# Altium PCB PCB1.PcbDoc
Units mil, origin at the board's own origin, x right, y up, seen from the top; angles counter-clockwise.
Board outline 3385.83 x 2204.72 mil, 2 copper layers (Top Side, Bottom Layer), stack 69.729 mil thick; 1 components, 52 nets, 636 pads, 1 vias.
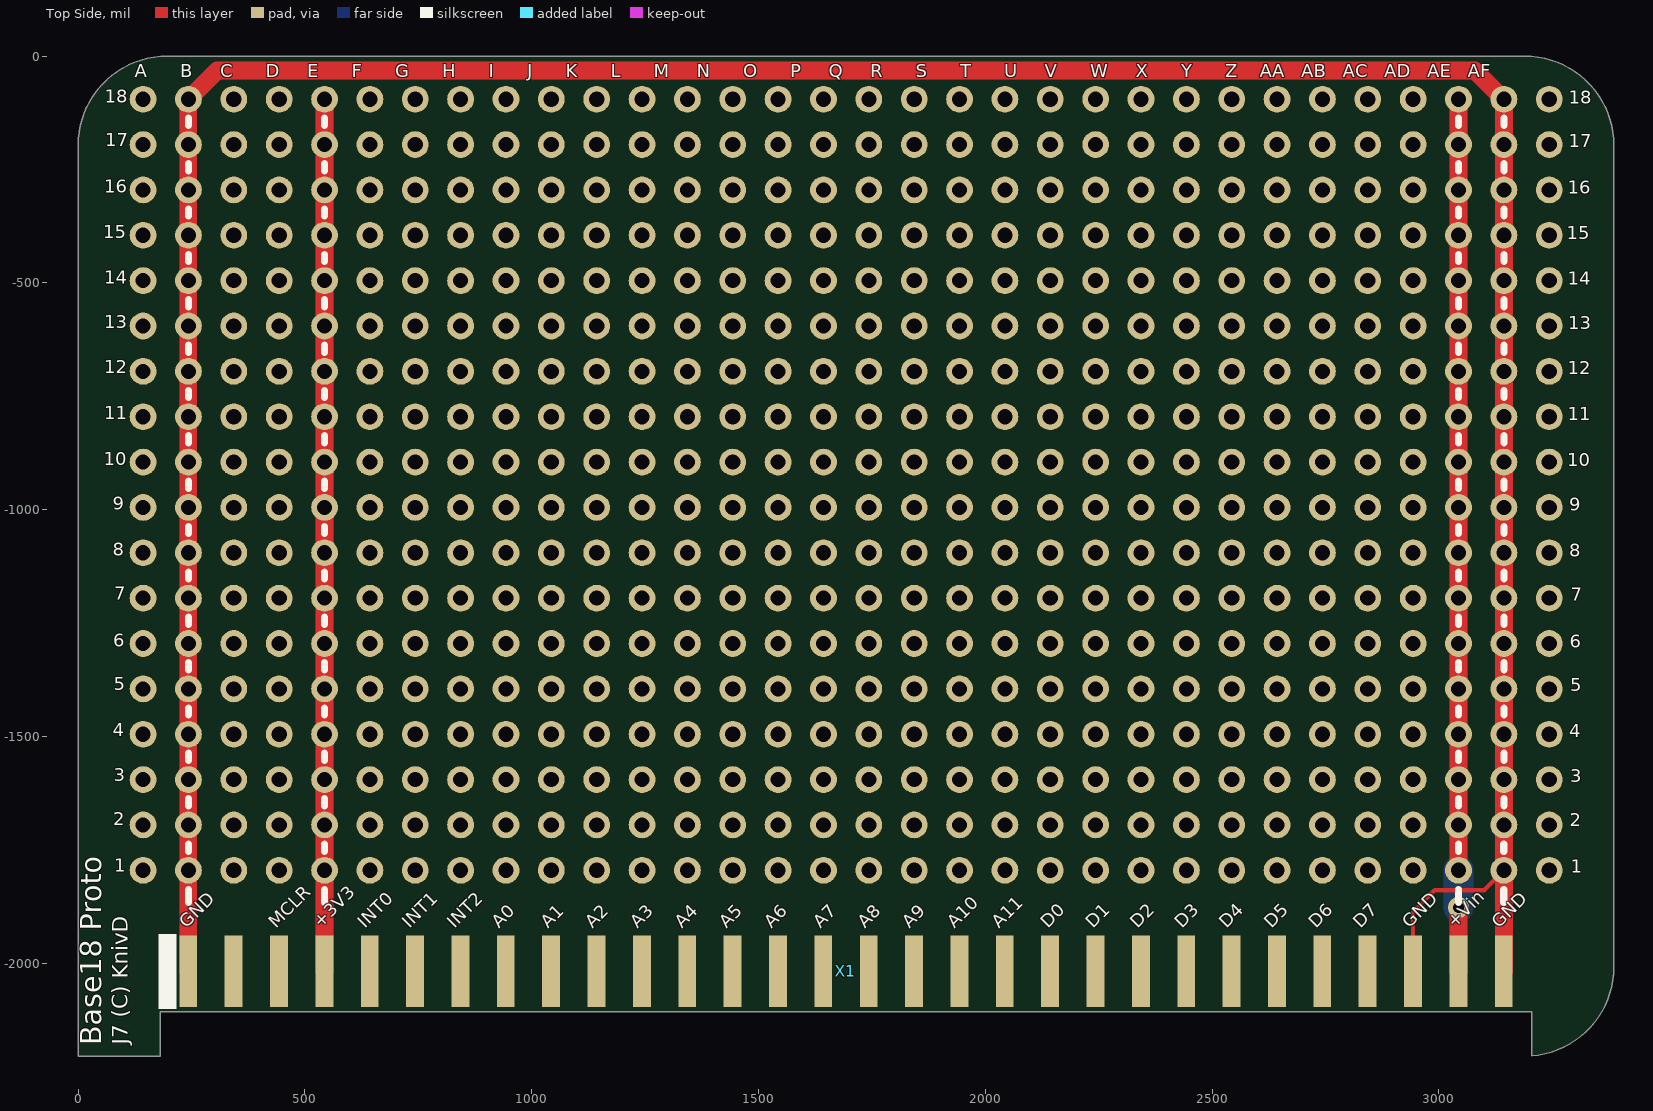
[diagram p0: Top Side view]
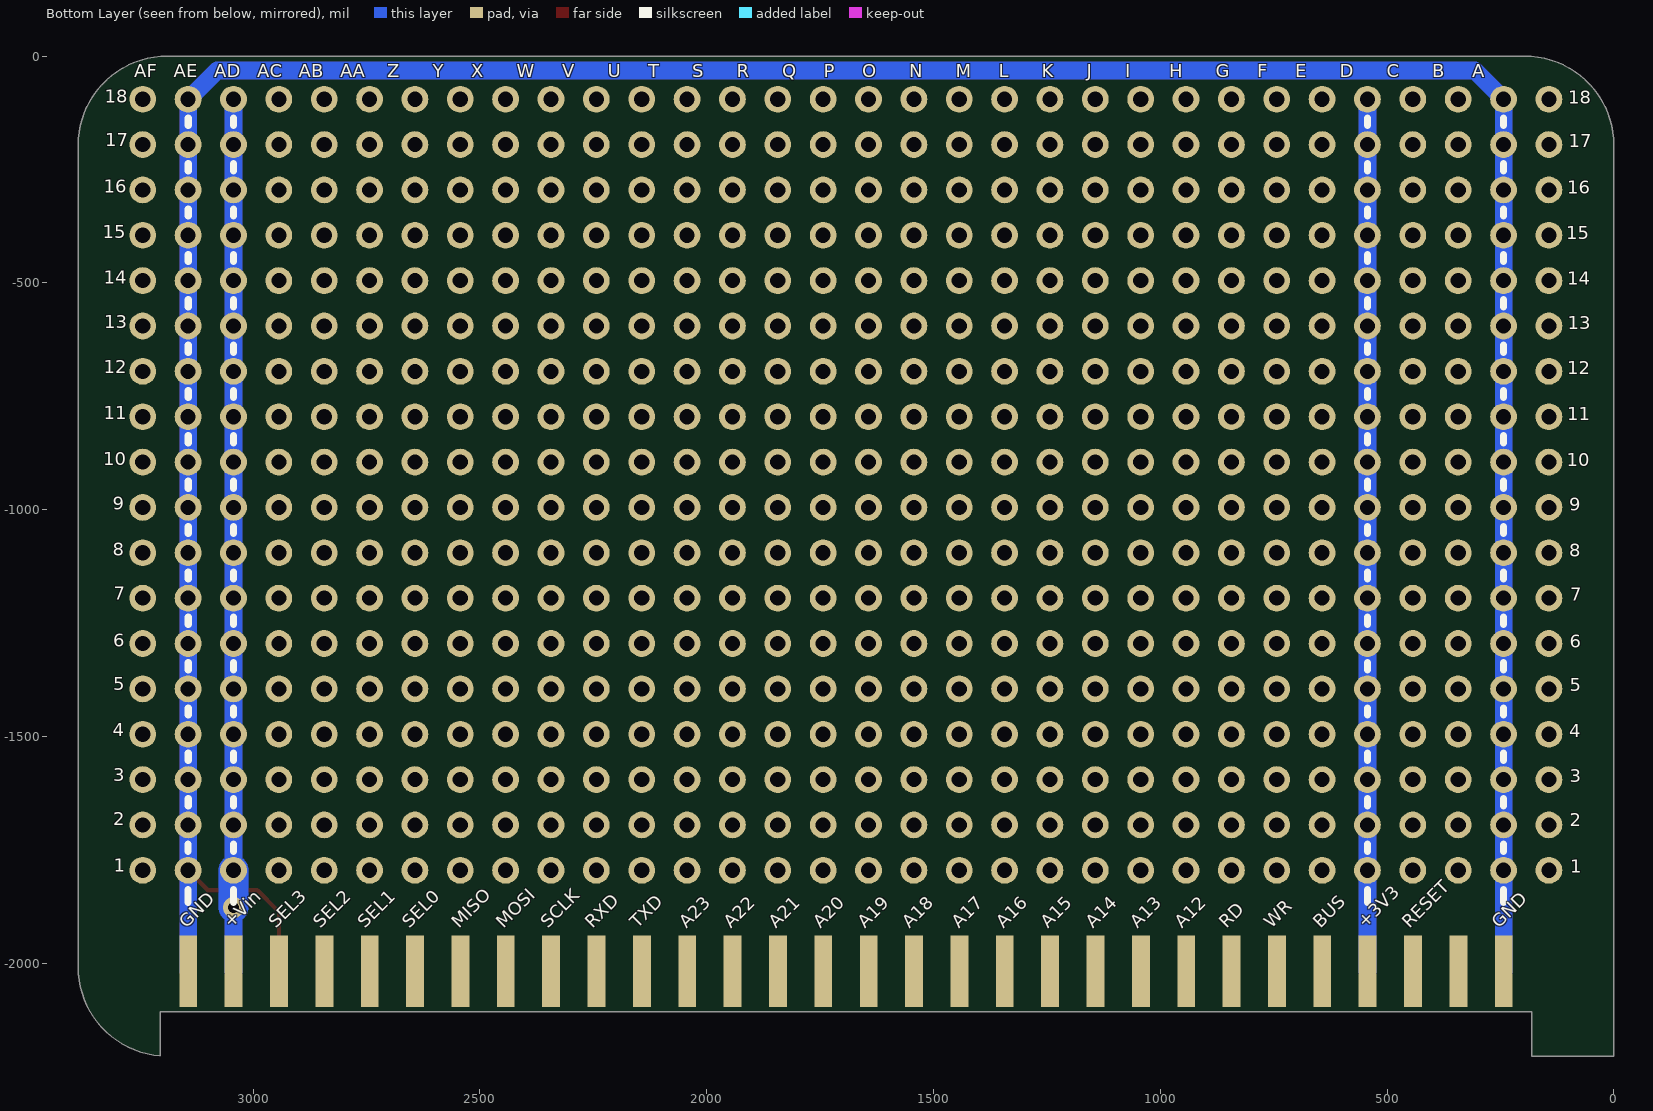
[diagram p1: Bottom Layer view, seen from below]

## Layer stack, top to bottom
Top Solder: solder mask 0.4, Solder Resist, Dk 3.5
Top Side: signal copper 1.4
Dielectric 1: core 66.9291, FR-4, Dk 4.2
Bottom Layer: signal copper 1.4
Solder Side: solder mask 0.4, Solder Resist, Dk 3.5

## Board outline
0,-2204.72 0,-196.85 cw(c196.85,-196.85) 196.85,0 3188.98,0 cw(c3188.98,-196.85) 3385.83,-196.85 3385.83,-2007.87 cw(c3188.98,-2007.87) 3204.67,-2204.1 3204.72,-2204.1 3204.72,-2106.3 181.1,-2106.3 181.1,-2204.72

## Design rules (kind name [scope] priority, off if disabled: settings)
Clearance Clearance_Pour [IsRegion] p1: gap=11.81 ignorepadtopadclearanceinfootprint=TRUE
Clearance [All] p2: gap=7.87 ignorepadtopadclearanceinfootprint=TRUE
Height [All] p1: minheight=0 maxheight=3937.01 prefheight=500
HoleSize [All] p1: absolutevalues=TRUE maxlimit=196.85 minlimit=1 maxpercent=80.000 minpercent=20.000
HoleToHoleClearance [All] p1: gap=0 allowstackedmicrovias=TRUE
MinimumSolderMaskSliver [All] p1: minsoldermaskwidth=0
PolygonConnect [All] p1: thpad.connectstyle=Relief thpad.reliefconductorwidth=9.84 thpad.reliefentries=4 thpad.polygonreliefangle="90 Angle" thpad.airgapwidth=9.84 smdpad.connectstyle=Relief smdpad.reliefconductorwidth=9.84 smdpad.reliefentries=4 smdpad.polygonreliefangle="90 Angle" smdpad.airgapwidth=9.84 via.connectstyle=Direct via.reliefconductorwidth=10 via.reliefentries=4 via.polygonreliefangle="45 Angle" via.airgapwidth=10
RoutingVias [All] p1: holewidth=11.81 width=23.62 viastyle="Through Hole" minholewidth=9.84 minwidth=19.68 maxholewidth=59.06 maxwidth=118.11
SilkToSilkClearance [All] p1: silktosilkclearance=-393.7
SilkToSolderMaskClearance [IsPad] p1: minsilkscreentomaskgap=-393.7 clearancetoexposedcopper=TRUE
SolderMaskExpansion SolderMaskExpansion_VIA [IsVia] p1: expansion=-11.81 soldermaskfromhole=TRUE
SolderMaskExpansion [All] p2: expansion=4
Width [All] p1: maxlimit=393.7 minlimit=7.87 preferedwidth=9.84
24 further rules are at their usual default settings.

## Components (designator, comment, footprint, x,y, rotation, side; value= is the part's Value field where it differs from the comment)
X1 "TSW-130-07-G-D" DIL60-M-EDGE 1692.91,-1986.22 r0 top locked

## Footprints (in the part's own frame and the unit in brackets; to place one, negate y for a bottom-side part, rotate by r counter-clockwise, add the part's x,y. Pads: shape width x height; smd on the part's side, far side on the other; paste and mask are expansions set on the pad)
DIL60-M-EDGE [mm] "DIL60 header soldered as edge connector"
  rect 1x4 smd: 1(-36.83,-0.8) 3(-34.29,-0.8) 5(-31.75,-0.8) 7(-29.21,-0.8) 9(-26.67,-0.8) 11(-24.13,-0.8) 13(-21.59,-0.8) 15(-19.05,-0.8) 17(-16.51,-0.8) 19(-13.97,-0.8) 21(-11.43,-0.8) 23(-8.89,-0.8) 25(-6.35,-0.8) 27(-3.81,-0.8) 29(-1.27,-0.8) 31(1.27,-0.8) 33(3.81,-0.8) 35(6.35,-0.8) 37(8.89,-0.8) 39(11.43,-0.8) 41(13.97,-0.8) 43(16.51,-0.8) 45(19.05,-0.8) 47(21.59,-0.8) 49(24.13,-0.8) 51(26.67,-0.8) 53(29.21,-0.8) 55(31.75,-0.8) 57(34.29,-0.8) 59(36.83,-0.8)
  rect 1x4 smd far side: 2(-36.83,-0.8) 4(-34.29,-0.8) 6(-31.75,-0.8) 8(-29.21,-0.8) 10(-26.67,-0.8) 12(-24.13,-0.8) 14(-21.59,-0.8) 16(-19.05,-0.8) 18(-16.51,-0.8) 20(-13.97,-0.8) 22(-11.43,-0.8) 24(-8.89,-0.8) 26(-6.35,-0.8) 28(-3.81,-0.8) 30(-1.27,-0.8) 32(1.27,-0.8) 34(3.81,-0.8) 36(6.35,-0.8) 38(8.89,-0.8) 40(11.43,-0.8) 42(13.97,-0.8) 44(16.51,-0.8) 46(19.05,-0.8) 48(21.59,-0.8) 50(24.13,-0.8) 52(26.67,-0.8) 54(29.21,-0.8) 56(31.75,-0.8) 58(34.29,-0.8) 60(36.83,-0.8)
  silkscreen extent -38.5,-2.9 -37.5,1.3, body extent -38.1,-10.83 38.1,0.09, height 1.64

## Part data
X1: library part "Connector 2x30", "Dual row, 60-way connector"

## Free pads (board coordinates)
  round 59.06 hole 33.46 unplated: 0(143.29,-1795) 0(143.29,-1695) 0(143.29,-1595) 0(143.29,-1495) 0(143.29,-1395) 0(143.29,-1295) 0(143.29,-1195) 0(143.29,-1095) 0(143.29,-995) 0(143.29,-895) 0(143.29,-795) 0(143.29,-695) 0(143.29,-595) 0(143.29,-495) 0(143.29,-395) 0(143.29,-295) 0(143.29,-195) 0(143.29,-95) 0(243.29,-1795) 0(243.29,-1695) 0(243.29,-1595) 0(243.29,-1495) 0(243.29,-1395) 0(243.29,-1295) 0(243.29,-1195) 0(243.29,-1095) 0(243.29,-995) 0(243.29,-895) 0(243.29,-795) 0(243.29,-695) 0(243.29,-595) 0(243.29,-495) 0(243.29,-395) 0(243.29,-295) 0(243.29,-195) 0(243.29,-95) 0(343.29,-1795) 0(343.29,-1695) 0(343.29,-1595) 0(343.29,-1495) 0(343.29,-1395) 0(343.29,-1295) 0(343.29,-1195) 0(343.29,-1095) 0(343.29,-995) 0(343.29,-895) 0(343.29,-795) 0(343.29,-695) 0(343.29,-595) 0(343.29,-495) 0(343.29,-395) 0(343.29,-295) 0(343.29,-195) 0(343.29,-95) 0(443.29,-1795) 0(443.29,-1695) 0(443.29,-1595) 0(443.29,-1495) 0(443.29,-1395) 0(443.29,-1295) 0(443.29,-1195) 0(443.29,-1095) 0(443.29,-995) 0(443.29,-895) 0(443.29,-795) 0(443.29,-695) 0(443.29,-595) 0(443.29,-495) 0(443.29,-395) 0(443.29,-295) 0(443.29,-195) 0(443.29,-95) 0(543.29,-1795) 0(543.29,-1695) 0(543.29,-1595) 0(543.29,-1495) 0(543.29,-1395) 0(543.29,-1295) 0(543.29,-1195) 0(543.29,-1095) 0(543.29,-995) 0(543.29,-895) 0(543.29,-795) 0(543.29,-695) 0(543.29,-595) 0(543.29,-495) 0(543.29,-395) 0(543.29,-295) 0(543.29,-195) 0(543.29,-95) 0(643.29,-1795) 0(643.29,-1695) 0(643.29,-1595) 0(643.29,-1495) 0(643.29,-1395) 0(643.29,-1295) 0(643.29,-1195) 0(643.29,-1095) 0(643.29,-995) 0(643.29,-895) 0(643.29,-795) 0(643.29,-695) 0(643.29,-595) 0(643.29,-495) 0(643.29,-395) 0(643.29,-295) 0(643.29,-195) 0(643.29,-95) 0(743.29,-1795) 0(743.29,-1695) 0(743.29,-1595) 0(743.29,-1495) 0(743.29,-1395) 0(743.29,-1295) 0(743.29,-1195) 0(743.29,-1095) 0(743.29,-995) 0(743.29,-895) 0(743.29,-795) 0(743.29,-695) 0(743.29,-595) 0(743.29,-495) 0(743.29,-395) 0(743.29,-295) 0(743.29,-195) 0(743.29,-95) 0(843.29,-1795) 0(843.29,-1695) 0(843.29,-1595) 0(843.29,-1495) 0(843.29,-1395) 0(843.29,-1295) 0(843.29,-1195) 0(843.29,-1095) 0(843.29,-995) 0(843.29,-895) 0(843.29,-795) 0(843.29,-695) 0(843.29,-595) 0(843.29,-495) 0(843.29,-395) 0(843.29,-295) 0(843.29,-195) 0(843.29,-95) 0(943.29,-1795) 0(943.29,-1695) 0(943.29,-1595) 0(943.29,-1495) 0(943.29,-1395) 0(943.29,-1295) 0(943.29,-1195) 0(943.29,-1095) 0(943.29,-995) 0(943.29,-895) 0(943.29,-795) 0(943.29,-695) 0(943.29,-595) 0(943.29,-495) 0(943.29,-395) 0(943.29,-295) 0(943.29,-195) 0(943.29,-95) 0(1043.29,-1795) 0(1043.29,-1695) 0(1043.29,-1595) 0(1043.29,-1495) 0(1043.29,-1395) 0(1043.29,-1295) 0(1043.29,-1195) 0(1043.29,-1095) 0(1043.29,-995) 0(1043.29,-895) 0(1043.29,-795) 0(1043.29,-695) 0(1043.29,-595) 0(1043.29,-495) 0(1043.29,-395) 0(1043.29,-295) 0(1043.29,-195) 0(1043.29,-95) 0(1143.29,-1795) 0(1143.29,-1695) 0(1143.29,-1595) 0(1143.29,-1495) 0(1143.29,-1395) 0(1143.29,-1295) 0(1143.29,-1195) 0(1143.29,-1095) 0(1143.29,-995) 0(1143.29,-895) 0(1143.29,-795) 0(1143.29,-695) 0(1143.29,-595) 0(1143.29,-495) 0(1143.29,-395) 0(1143.29,-295) 0(1143.29,-195) 0(1143.29,-95) 0(1243.29,-1795) 0(1243.29,-1695) 0(1243.29,-1595) 0(1243.29,-1495) 0(1243.29,-1395) 0(1243.29,-1295) 0(1243.29,-1195) 0(1243.29,-1095) 0(1243.29,-995) 0(1243.29,-895) 0(1243.29,-795) 0(1243.29,-695) 0(1243.29,-595) 0(1243.29,-495) 0(1243.29,-395) 0(1243.29,-295) 0(1243.29,-195) 0(1243.29,-95) 0(1343.29,-1795) 0(1343.29,-1695) 0(1343.29,-1595) 0(1343.29,-1495) 0(1343.29,-1395) 0(1343.29,-1295) 0(1343.29,-1195) 0(1343.29,-1095) 0(1343.29,-995) 0(1343.29,-895) 0(1343.29,-795) 0(1343.29,-695) 0(1343.29,-595) 0(1343.29,-495) 0(1343.29,-395) 0(1343.29,-295) 0(1343.29,-195) 0(1343.29,-95) 0(1443.29,-1795) 0(1443.29,-1695) 0(1443.29,-1595) 0(1443.29,-1495) 0(1443.29,-1395) 0(1443.29,-1295) 0(1443.29,-1195) 0(1443.29,-1095) 0(1443.29,-995) 0(1443.29,-895) 0(1443.29,-795) 0(1443.29,-695) 0(1443.29,-595) 0(1443.29,-495) 0(1443.29,-395) 0(1443.29,-295) 0(1443.29,-195) 0(1443.29,-95) 0(1543.29,-1795) 0(1543.29,-1695) 0(1543.29,-1595) 0(1543.29,-1495) 0(1543.29,-1395) 0(1543.29,-1295) 0(1543.29,-1195) 0(1543.29,-1095) 0(1543.29,-995) 0(1543.29,-895) 0(1543.29,-795) 0(1543.29,-695) 0(1543.29,-595) 0(1543.29,-495) 0(1543.29,-395) 0(1543.29,-295) 0(1543.29,-195) 0(1543.29,-95) 0(1643.29,-1795) 0(1643.29,-1695) 0(1643.29,-1595) 0(1643.29,-1495) 0(1643.29,-1395) 0(1643.29,-1295) 0(1643.29,-1195) 0(1643.29,-1095) 0(1643.29,-995) 0(1643.29,-895) 0(1643.29,-795) 0(1643.29,-695) 0(1643.29,-595) 0(1643.29,-495) 0(1643.29,-395) 0(1643.29,-295) 0(1643.29,-195) 0(1643.29,-95) 0(1743.29,-1795) 0(1743.29,-1695) 0(1743.29,-1595) 0(1743.29,-1495) 0(1743.29,-1395) 0(1743.29,-1295) 0(1743.29,-1195) 0(1743.29,-1095) 0(1743.29,-995) 0(1743.29,-895) 0(1743.29,-795) 0(1743.29,-695) 0(1743.29,-595) 0(1743.29,-495) 0(1743.29,-395) 0(1743.29,-295) 0(1743.29,-195) 0(1743.29,-95) 0(1843.29,-1795) 0(1843.29,-1695) 0(1843.29,-1595) 0(1843.29,-1495) 0(1843.29,-1395) 0(1843.29,-1295) 0(1843.29,-1195) 0(1843.29,-1095) 0(1843.29,-995) 0(1843.29,-895) 0(1843.29,-795) 0(1843.29,-695) 0(1843.29,-595) 0(1843.29,-495) 0(1843.29,-395) 0(1843.29,-295) 0(1843.29,-195) 0(1843.29,-95) 0(1943.29,-1795) 0(1943.29,-1695) 0(1943.29,-1595) 0(1943.29,-1495) 0(1943.29,-1395) 0(1943.29,-1295) 0(1943.29,-1195) 0(1943.29,-1095) 0(1943.29,-995) 0(1943.29,-895) 0(1943.29,-795) 0(1943.29,-695) 0(1943.29,-595) 0(1943.29,-495) 0(1943.29,-395) 0(1943.29,-295) 0(1943.29,-195) 0(1943.29,-95) 0(2043.29,-1795) 0(2043.29,-1695) 0(2043.29,-1595) 0(2043.29,-1495) 0(2043.29,-1395) 0(2043.29,-1295) 0(2043.29,-1195) 0(2043.29,-1095) 0(2043.29,-995) 0(2043.29,-895) 0(2043.29,-795) 0(2043.29,-695) 0(2043.29,-595) 0(2043.29,-495) 0(2043.29,-395) 0(2043.29,-295) 0(2043.29,-195) 0(2043.29,-95) 0(2143.29,-1795) 0(2143.29,-1695) 0(2143.29,-1595) 0(2143.29,-1495) 0(2143.29,-1395) 0(2143.29,-1295) 0(2143.29,-1195) 0(2143.29,-1095) 0(2143.29,-995) 0(2143.29,-895) 0(2143.29,-795) 0(2143.29,-695) 0(2143.29,-595) 0(2143.29,-495) 0(2143.29,-395) 0(2143.29,-295) 0(2143.29,-195) 0(2143.29,-95) 0(2243.29,-1795) 0(2243.29,-1695) 0(2243.29,-1595) 0(2243.29,-1495) 0(2243.29,-1395) 0(2243.29,-1295) 0(2243.29,-1195) 0(2243.29,-1095) 0(2243.29,-995) 0(2243.29,-895) 0(2243.29,-795) 0(2243.29,-695) 0(2243.29,-595) 0(2243.29,-495) 0(2243.29,-395) 0(2243.29,-295) 0(2243.29,-195) 0(2243.29,-95) 0(2343.29,-1795) 0(2343.29,-1695) 0(2343.29,-1595) 0(2343.29,-1495) 0(2343.29,-1395) 0(2343.29,-1295) 0(2343.29,-1195) 0(2343.29,-1095) 0(2343.29,-995) 0(2343.29,-895) 0(2343.29,-795) 0(2343.29,-695) 0(2343.29,-595) 0(2343.29,-495) 0(2343.29,-395) 0(2343.29,-295) 0(2343.29,-195) 0(2343.29,-95) 0(2443.29,-1795) 0(2443.29,-1695) 0(2443.29,-1595) 0(2443.29,-1495) 0(2443.29,-1395) 0(2443.29,-1295) 0(2443.29,-1195) 0(2443.29,-1095) 0(2443.29,-995) 0(2443.29,-895) 0(2443.29,-795) 0(2443.29,-695) 0(2443.29,-595) 0(2443.29,-495) 0(2443.29,-395) 0(2443.29,-295) 0(2443.29,-195) 0(2443.29,-95) 0(2543.29,-1795) 0(2543.29,-1695) 0(2543.29,-1595) 0(2543.29,-1495) 0(2543.29,-1395) 0(2543.29,-1295) 0(2543.29,-1195) 0(2543.29,-1095) 0(2543.29,-995) 0(2543.29,-895) 0(2543.29,-795) 0(2543.29,-695) 0(2543.29,-595) 0(2543.29,-495) 0(2543.29,-395) 0(2543.29,-295) 0(2543.29,-195) 0(2543.29,-95) 0(2643.29,-1795) 0(2643.29,-1695) 0(2643.29,-1595) 0(2643.29,-1495) 0(2643.29,-1395) 0(2643.29,-1295) 0(2643.29,-1195) 0(2643.29,-1095) 0(2643.29,-995) 0(2643.29,-895) 0(2643.29,-795) 0(2643.29,-695) 0(2643.29,-595) 0(2643.29,-495) 0(2643.29,-395) 0(2643.29,-295) 0(2643.29,-195) 0(2643.29,-95) 0(2743.29,-1795) 0(2743.29,-1695) 0(2743.29,-1595) 0(2743.29,-1495) 0(2743.29,-1395) 0(2743.29,-1295) 0(2743.29,-1195) 0(2743.29,-1095) 0(2743.29,-995) 0(2743.29,-895) 0(2743.29,-795) 0(2743.29,-695) 0(2743.29,-595) 0(2743.29,-495) 0(2743.29,-395) 0(2743.29,-295) 0(2743.29,-195) 0(2743.29,-95) 0(2843.29,-1795) 0(2843.29,-1695) 0(2843.29,-1595) 0(2843.29,-1495) 0(2843.29,-1395) 0(2843.29,-1295) 0(2843.29,-1195) 0(2843.29,-1095) 0(2843.29,-995) 0(2843.29,-895) 0(2843.29,-795) 0(2843.29,-695) 0(2843.29,-595) 0(2843.29,-495) 0(2843.29,-395) 0(2843.29,-295) 0(2843.29,-195) 0(2843.29,-95) 0(2943.29,-1795) 0(2943.29,-1695) 0(2943.29,-1595) 0(2943.29,-1495) 0(2943.29,-1395) 0(2943.29,-1295) 0(2943.29,-1195) 0(2943.29,-1095) 0(2943.29,-995) 0(2943.29,-895) 0(2943.29,-795) 0(2943.29,-695) 0(2943.29,-595) 0(2943.29,-495) 0(2943.29,-395) 0(2943.29,-295) 0(2943.29,-195) 0(2943.29,-95) 0(3043.29,-1795) 0(3043.29,-1695) 0(3043.29,-1595) 0(3043.29,-1495) 0(3043.29,-1395) 0(3043.29,-1295) 0(3043.29,-1195) 0(3043.29,-1095) 0(3043.29,-995) 0(3043.29,-895) 0(3043.29,-795) 0(3043.29,-695) 0(3043.29,-595) 0(3043.29,-495) 0(3043.29,-395) 0(3043.29,-295) 0(3043.29,-195) 0(3043.29,-95) 0(3143.29,-1795) 0(3143.29,-1695) 0(3143.29,-1595) 0(3143.29,-1495) 0(3143.29,-1395) 0(3143.29,-1295) 0(3143.29,-1195) 0(3143.29,-1095) 0(3143.29,-995) 0(3143.29,-895) 0(3143.29,-795) 0(3143.29,-695) 0(3143.29,-595) 0(3143.29,-495) 0(3143.29,-395) 0(3143.29,-295) 0(3143.29,-195) 0(3143.29,-95) 0(3243.29,-1795) 0(3243.29,-1695) 0(3243.29,-1595) 0(3243.29,-1495) 0(3243.29,-1395) 0(3243.29,-1295) 0(3243.29,-1195) 0(3243.29,-1095) 0(3243.29,-995) 0(3243.29,-895) 0(3243.29,-795) 0(3243.29,-695) 0(3243.29,-595) 0(3243.29,-495) 0(3243.29,-395) 0(3243.29,-295) 0(3243.29,-195) 0(3243.29,-95)

## Via types
v1: diameter 47.24, hole 23.62, Top Side to Bottom Layer, tented both sides, 1 vias

## Nets (pads, with @x,y where several pads share a name; then routed paths per layer and width w, separated by ;. In a path a pad name is that pad's centre, name@x,y a point inside that pad or via, vN(x,y) a via of type N, cw(c..) or ccw(c..) an arc to the next point about the centre after c; other vN are vias at no path point)
+3V3: pad.0@543.29,-95 pad.0@543.29,-195 pad.0@543.29,-295 pad.0@543.29,-395 pad.0@543.29,-495 pad.0@543.29,-595 pad.0@543.29,-695 pad.0@543.29,-795 pad.0@543.29,-895 pad.0@543.29,-995 pad.0@543.29,-1095 pad.0@543.29,-1195 pad.0@543.29,-1295 pad.0@543.29,-1395 pad.0@543.29,-1495 pad.0@543.29,-1595 pad.0@543.29,-1695 pad.0@543.29,-1795 X1.7 X1.8 | length 3845.7
  Top Side w39.37: X1.7 542.91,-95.38 pad.0@543.29,-95
  Bottom Layer w39.37: X1.8 542.91,-95.38 pad.0@543.29,-95
+Vin: pad.0@3043.29,-95 pad.0@3043.29,-195 pad.0@3043.29,-295 pad.0@3043.29,-395 pad.0@3043.29,-495 pad.0@3043.29,-595 pad.0@3043.29,-695 pad.0@3043.29,-795 pad.0@3043.29,-895 pad.0@3043.29,-995 pad.0@3043.29,-1095 pad.0@3043.29,-1195 pad.0@3043.29,-1295 pad.0@3043.29,-1395 pad.0@3043.29,-1495 pad.0@3043.29,-1595 pad.0@3043.29,-1695 pad.0@3043.29,-1795 X1.57 X1.58 | length 3763.9
  Top Side w39.37: X1.57 3043.29,-2017.34 v1(3043.29,-1876.97) ; pad.0@3042.91,-1795 3042.91,-95.38 pad.0@3043.29,-95
  Bottom Layer w39.37: X1.58 3043.29,-2017.34 v1(3043.29,-1876.97) ; pad.0@3043.29,-1795 3043.29,-1695 3043.29,-1595 3043.29,-1495 3043.29,-1395 3043.29,-1295 3043.29,-1195 3043.29,-1095 3043.29,-995 3043.29,-895 3043.29,-795 3043.29,-695 3043.29,-595 3043.29,-495 3043.29,-395 3043.29,-295 3043.29,-195 pad.0@3043.29,-95
  Bottom Layer w66.93: v1(3043.29,-1876.97) pad.0@3043.29,-1795
A00: X1.15
A01: X1.17
A02: X1.19
A03: X1.21
A04: X1.23
A05: X1.25
A06: X1.27
A07: X1.29
A08: X1.31
A09: X1.33
A10: X1.35
A11: X1.37
A12: X1.16
A13: X1.18
A14: X1.20
A15: X1.22
A16: X1.24
A17: X1.26
A18: X1.28
A19: X1.30
A20: X1.32
A21: X1.34
A22: X1.36
A23: X1.38
BUS#: X1.10
DB0: X1.39
DB1: X1.41
DB2: X1.43
DB3: X1.45
DB4: X1.47
DB5: X1.49
DB6: X1.51
DB7: X1.53
GND: pad.0@243.29,-95 pad.0@243.29,-195 pad.0@243.29,-295 pad.0@243.29,-395 pad.0@243.29,-495 pad.0@243.29,-595 pad.0@243.29,-695 pad.0@243.29,-795 pad.0@243.29,-895 pad.0@243.29,-995 pad.0@243.29,-1095 pad.0@243.29,-1195 pad.0@243.29,-1295 pad.0@243.29,-1395 pad.0@243.29,-1495 pad.0@243.29,-1595 pad.0@243.29,-1695 pad.0@243.29,-1795 pad.0@3143.29,-95 pad.0@3143.29,-195 pad.0@3143.29,-295 pad.0@3143.29,-395 pad.0@3143.29,-495 pad.0@3143.29,-595 pad.0@3143.29,-695 pad.0@3143.29,-795 pad.0@3143.29,-895 pad.0@3143.29,-995 pad.0@3143.29,-1095 pad.0@3143.29,-1195 pad.0@3143.29,-1295 pad.0@3143.29,-1395 pad.0@3143.29,-1495 pad.0@3143.29,-1595 pad.0@3143.29,-1695 pad.0@3143.29,-1795 X1.1 X1.2 X1.55 X1.59 X1.60 | length 13965.8
  Top Side w9.84: X1.55 2942.91,-1886.81 2991.14,-1838.58 3099.71,-1838.58 pad.0@3143.29,-1795
  Top Side w39.37: X1.1 242.91,-95.38 243.29,-95 306.79,-31.5 3079.03,-31.5 3142.54,-95 3143.29,-95 3143.29,-195 3143.29,-295 3143.29,-395 3143.29,-495 3143.29,-595 3143.29,-695 3143.29,-795 3143.29,-895 3143.29,-995 3143.29,-1095 3143.29,-1195 3143.29,-1295 3143.29,-1395 3143.29,-1495 3143.29,-1595 3143.29,-1695 3143.29,-1795 3143.29,-2017.34 X1.59
  Bottom Layer w39.37: X1.2 242.91,-95.38 243.29,-95 306.79,-31.5 3079.03,-31.5 pad.0@3142.91,-95.38 ; X1.60 pad.0@3142.91,-95.38 ; pad.0@3143.29,-95 pad.0@3142.91,-95.38
INT0#: X1.9
INT1#: X1.11
INT2#: X1.13
MCLR#: X1.5
MISO: X1.48
MOSI: X1.46
RD#: X1.14
RESET#: X1.6
RXD: X1.42
SCLK: X1.44
SEL0#: X1.50
SEL1#: X1.52
SEL2#: X1.54
SEL3#: X1.56
TXD: X1.40
WR#: X1.12
pads on no net: X1.3 X1.4

## Silkscreen, mask and mechanical layers (free items; w line width, h text height)
Top Overlay:
  lines w15.75: 243.11,-1866.14 243.11,-1837.6 ; 243.11,-1752.95 243.11,-1737.2 ; 243.47,-1652.79 243.47,-1637.05 ; 243.47,-1552.79 243.47,-1537.05 ; 243.47,-1452.79 243.47,-1437.05 ; 243.47,-1352.79 243.47,-1337.05 ; 243.47,-1252.79 243.47,-1237.05 ; 243.47,-1152.79 243.47,-1137.05 ; 243.47,-1052.79 243.47,-1037.05 ; 243.47,-952.79 243.47,-937.05 ; 243.47,-852.79 243.47,-837.05 ; 243.47,-752.79 243.47,-737.05 ; 243.47,-652.79 243.47,-637.05 ; 243.47,-552.79 243.47,-537.05 ; 243.47,-452.79 243.47,-437.05 ; 243.47,-352.79 243.47,-337.05 ; 243.47,-252.79 243.47,-237.05 ; 243.47,-152.79 243.47,-137.05 ; 543.11,-1866.14 543.11,-1837.6 ; 543.11,-1752.95 543.11,-1737.2 ; 543.47,-1652.79 543.47,-1637.05 ; 543.47,-1552.79 543.47,-1537.05 ; 543.47,-1452.79 543.47,-1437.05 ; 543.47,-1352.79 543.47,-1337.05 ; 543.47,-1252.79 543.47,-1237.05 ; 543.47,-1152.79 543.47,-1137.05 ; 543.47,-1052.79 543.47,-1037.05 ; 543.47,-952.79 543.47,-937.05 ; 543.47,-852.79 543.47,-837.05 ; 543.47,-752.79 543.47,-737.05 ; 543.47,-652.79 543.47,-637.05 ; 543.47,-552.79 543.47,-537.05 ; 543.47,-452.79 543.47,-437.05 ; 543.47,-352.79 543.47,-337.05 ; 543.47,-252.79 543.47,-237.05 ; 543.47,-152.79 543.47,-137.05 ; 3043.11,-1866.14 3043.11,-1837.6 ; 3043.11,-1752.95 3043.11,-1737.2 ; 3043.47,-1652.79 3043.47,-1637.05 ; 3043.47,-1552.79 3043.47,-1537.05 ; 3043.47,-1452.79 3043.47,-1437.05 ; 3043.47,-1352.79 3043.47,-1337.05 ; 3043.47,-1252.79 3043.47,-1237.05 ; 3043.47,-1152.79 3043.47,-1137.05 ; 3043.47,-1052.79 3043.47,-1037.05 ; 3043.47,-952.79 3043.47,-937.05 ; 3043.47,-852.79 3043.47,-837.05 ; 3043.47,-752.79 3043.47,-737.05 ; 3043.47,-652.79 3043.47,-637.05 ; 3043.47,-552.79 3043.47,-537.05 ; 3043.47,-452.79 3043.47,-437.05 ; 3043.47,-352.79 3043.47,-337.05 ; 3043.47,-252.79 3043.47,-237.05 ; 3043.47,-152.79 3043.47,-137.05 ; 3143.11,-1866.14 3143.11,-1837.6 ; 3143.11,-1752.95 3143.11,-1737.2 ; 3143.47,-1652.79 3143.47,-1637.05 ; 3143.47,-1552.79 3143.47,-1537.05 ; 3143.47,-1452.79 3143.47,-1437.05 ; 3143.47,-1352.79 3143.47,-1337.05 ; 3143.47,-1252.79 3143.47,-1237.05 ; 3143.47,-1152.79 3143.47,-1137.05 ; 3143.47,-1052.79 3143.47,-1037.05 ; 3143.47,-952.79 3143.47,-937.05 ; 3143.47,-852.79 3143.47,-837.05 ; 3143.47,-752.79 3143.47,-737.05 ; 3143.47,-652.79 3143.47,-637.05 ; 3143.47,-552.79 3143.47,-537.05 ; 3143.47,-452.79 3143.47,-437.05 ; 3143.47,-352.79 3143.47,-337.05 ; 3143.47,-252.79 3143.47,-237.05 ; 3143.47,-152.79 3143.47,-137.05
  text "A      B     C      D     E      F      G      H      I      J      K      L      M     N      O      P     Q     R      S      T      U     V      W     X      Y      Z    AA   AB   AC   AD   AE   AF" at 125,-56.1 h49.21
  text "18" at 59.06,-112.2 h49.21
  text "18" at 3285.84,-114.45 h49.21
  text "17" at 60.05,-208.66 h49.21
  text "17" at 3286.83,-210.91 h49.21
  text "16" at 57.09,-311.02 h49.21
  text "16" at 3283.88,-313.27 h49.21
  text "15" at 55.12,-411.42 h49.21
  text "15" at 3281.91,-413.66 h49.21
  text "14" at 57.09,-511.81 h49.21
  text "14" at 3283.88,-514.06 h49.21
  text "13" at 58.08,-610.24 h49.21
  text "13" at 3284.86,-612.48 h49.21
  text "12" at 57.09,-708.66 h49.21
  text "12" at 3283.88,-710.91 h49.21
  text "11" at 57.09,-810.04 h49.21
  text "11" at 3283.88,-812.28 h49.21
  text "10" at 56.11,-911.42 h49.21
  text "10" at 3282.89,-913.66 h49.21
  text "9" at 76.78,-1009.84 h49.21
  text "9" at 3287.81,-1012.09 h49.21
  text "8" at 76.78,-1111.22 h49.21
  text "8" at 3287.81,-1113.46 h49.21
  text "7" at 79.73,-1208.66 h49.21
  text "7" at 3290.76,-1210.91 h49.21
  text "6" at 77.76,-1312.01 h49.21
  text "6" at 3288.8,-1314.25 h49.21
  text "5" at 78.75,-1408.46 h49.21
  text "5" at 3289.78,-1410.71 h49.21
  text "4" at 76.78,-1508.86 h49.21
  text "4" at 3287.81,-1511.1 h49.21
  text "3" at 78.75,-1608.27 h49.21
  text "3" at 3289.78,-1610.51 h49.21
  text "2" at 77.76,-1705.71 h49.21
  text "2" at 3288.8,-1707.95 h49.21
  text "1" at 79.73,-1808.07 h49.21
  text "1" at 3290.76,-1810.32 h49.21
  text "GND" at 246.06,-1931.1 h49.21 r45
  text "MCLR" at 442.91,-1931.1 h49.21 r45
  text "+3V3" at 541.34,-1931.1 h49.21 r45
  text "INT0" at 639.76,-1931.1 h49.21 r45
  text "INT1" at 738.19,-1931.1 h49.21 r45
  text "INT2" at 836.61,-1931.1 h49.21 r45
  text "A0" at 935.04,-1931.1 h49.21 r45
  text "A1" at 1043.31,-1931.1 h49.21 r45
  text "A2" at 1141.73,-1931.1 h49.21 r45
  text "A3" at 1240.16,-1931.1 h49.21 r45
  text "A4" at 1338.58,-1931.1 h49.21 r45
  text "A5" at 1437.01,-1931.1 h49.21 r45
  text "A6" at 1535.43,-1931.1 h49.21 r45
  text "A7" at 1643.7,-1931.1 h49.21 r45
  text "A8" at 1742.13,-1931.1 h49.21 r45
  text "A9" at 1840.55,-1931.1 h49.21 r45
  text "A10" at 1938.98,-1931.1 h49.21 r45
  text "A11" at 2037.4,-1931.1 h49.21 r45
  text "D0" at 2145.67,-1931.1 h49.21 r45
  text "D1" at 2244.1,-1931.1 h49.21 r45
  text "D2" at 2342.52,-1931.1 h49.21 r45
  text "D3" at 2440.95,-1931.1 h49.21 r45
  text "D4" at 2539.37,-1931.1 h49.21 r45
  text "D5" at 2637.8,-1931.1 h49.21 r45
  text "D6" at 2736.22,-1931.1 h49.21 r45
  text "D7" at 2834.65,-1931.1 h49.21 r45
  text "GND" at 2942.91,-1931.1 h49.21 r45
  text "+Vin" at 3041.34,-1931.1 h49.21 r45
  text "GND" at 3139.76,-1931.1 h49.21 r45
  text "J7 (C) KnivD" at 121.06,-2180.12 h59.06 r90
  text "Base18 Proto" at 66.93,-2181.1 h78.74 r90
Bottom Overlay:
  lines w15.75: 243.11,-1652.79 243.11,-1637.05 ; 243.11,-1552.79 243.11,-1537.05 ; 243.11,-1452.79 243.11,-1437.05 ; 243.11,-1352.79 243.11,-1337.05 ; 243.11,-1252.79 243.11,-1237.05 ; 243.11,-1152.79 243.11,-1137.05 ; 243.11,-1052.79 243.11,-1037.05 ; 243.11,-952.79 243.11,-937.05 ; 243.11,-852.79 243.11,-837.05 ; 243.11,-752.79 243.11,-737.05 ; 243.11,-652.79 243.11,-637.05 ; 243.11,-552.79 243.11,-537.05 ; 243.11,-452.79 243.11,-437.05 ; 243.11,-352.79 243.11,-337.05 ; 243.11,-252.79 243.11,-237.05 ; 243.11,-152.79 243.11,-137.05 ; 243.47,-1866.14 243.47,-1837.6 ; 243.47,-1752.95 243.47,-1737.2 ; 543.11,-1652.79 543.11,-1637.05 ; 543.11,-1552.79 543.11,-1537.05 ; 543.11,-1452.79 543.11,-1437.05 ; 543.11,-1352.79 543.11,-1337.05 ; 543.11,-1252.79 543.11,-1237.05 ; 543.11,-1152.79 543.11,-1137.05 ; 543.11,-1052.79 543.11,-1037.05 ; 543.11,-952.79 543.11,-937.05 ; 543.11,-852.79 543.11,-837.05 ; 543.11,-752.79 543.11,-737.05 ; 543.11,-652.79 543.11,-637.05 ; 543.11,-552.79 543.11,-537.05 ; 543.11,-452.79 543.11,-437.05 ; 543.11,-352.79 543.11,-337.05 ; 543.11,-252.79 543.11,-237.05 ; 543.11,-152.79 543.11,-137.05 ; 543.47,-1866.14 543.47,-1837.6 ; 543.47,-1752.95 543.47,-1737.2 ; 3043.11,-1652.79 3043.11,-1637.05 ; 3043.11,-1552.79 3043.11,-1537.05 ; 3043.11,-1452.79 3043.11,-1437.05 ; 3043.11,-1352.79 3043.11,-1337.05 ; 3043.11,-1252.79 3043.11,-1237.05 ; 3043.11,-1152.79 3043.11,-1137.05 ; 3043.11,-1052.79 3043.11,-1037.05 ; 3043.11,-952.79 3043.11,-937.05 ; 3043.11,-852.79 3043.11,-837.05 ; 3043.11,-752.79 3043.11,-737.05 ; 3043.11,-652.79 3043.11,-637.05 ; 3043.11,-552.79 3043.11,-537.05 ; 3043.11,-452.79 3043.11,-437.05 ; 3043.11,-352.79 3043.11,-337.05 ; 3043.11,-252.79 3043.11,-237.05 ; 3043.11,-152.79 3043.11,-137.05 ; 3043.47,-1866.14 3043.47,-1837.6 ; 3043.47,-1752.95 3043.47,-1737.2 ; 3143.11,-1652.79 3143.11,-1637.05 ; 3143.11,-1552.79 3143.11,-1537.05 ; 3143.11,-1452.79 3143.11,-1437.05 ; 3143.11,-1352.79 3143.11,-1337.05 ; 3143.11,-1252.79 3143.11,-1237.05 ; 3143.11,-1152.79 3143.11,-1137.05 ; 3143.11,-1052.79 3143.11,-1037.05 ; 3143.11,-952.79 3143.11,-937.05 ; 3143.11,-852.79 3143.11,-837.05 ; 3143.11,-752.79 3143.11,-737.05 ; 3143.11,-652.79 3143.11,-637.05 ; 3143.11,-552.79 3143.11,-537.05 ; 3143.11,-452.79 3143.11,-437.05 ; 3143.11,-352.79 3143.11,-337.05 ; 3143.11,-252.79 3143.11,-237.05 ; 3143.11,-152.79 3143.11,-137.05 ; 3143.47,-1866.14 3143.47,-1837.6 ; 3143.47,-1752.95 3143.47,-1737.2
  text "AF   AE   AD   AC   AB   AA    Z      Y     X      W     V      U     T      S      R      Q     P     O      N      M     L      K      J      I       H      G     F     E      D      C      B     A" at 3261.58,-56.1 h49.21
  text "18" at 3327.52,-112.2 h49.21
  text "18" at 100.74,-114.45 h49.21
  text "17" at 3326.53,-208.66 h49.21
  text "17" at 99.75,-210.91 h49.21
  text "16" at 3329.49,-311.02 h49.21
  text "16" at 102.7,-313.27 h49.21
  text "15" at 3331.46,-411.42 h49.21
  text "15" at 104.67,-413.66 h49.21
  text "14" at 3329.49,-511.81 h49.21
  text "14" at 102.7,-514.06 h49.21
  text "13" at 3328.5,-610.24 h49.21
  text "13" at 101.72,-612.48 h49.21
  text "12" at 3329.49,-708.66 h49.21
  text "12" at 102.7,-710.91 h49.21
  text "11" at 3329.49,-810.04 h49.21
  text "11" at 102.7,-812.28 h49.21
  text "10" at 3330.47,-911.42 h49.21
  text "10" at 103.69,-913.66 h49.21
  text "9" at 3309.8,-1009.84 h49.21
  text "9" at 98.77,-1012.09 h49.21
  text "8" at 3309.8,-1111.22 h49.21
  text "8" at 98.77,-1113.46 h49.21
  text "7" at 3306.85,-1208.66 h49.21
  text "7" at 95.82,-1210.91 h49.21
  text "6" at 3308.82,-1312.01 h49.21
  text "6" at 97.78,-1314.25 h49.21
  text "5" at 3307.83,-1408.46 h49.21
  text "5" at 96.8,-1410.71 h49.21
  text "4" at 3309.8,-1508.86 h49.21
  text "4" at 98.77,-1511.1 h49.21
  text "3" at 3307.83,-1608.27 h49.21
  text "3" at 96.8,-1610.51 h49.21
  text "2" at 3308.82,-1705.71 h49.21
  text "2" at 97.78,-1707.95 h49.21
  text "1" at 3306.85,-1808.07 h49.21
  text "1" at 95.82,-1810.32 h49.21
  text "GND" at 246.06,-1931.1 h49.21 r315
  text "RESET" at 442.91,-1931.1 h49.21 r315
  text "+3V3" at 541.34,-1931.1 h49.21 r315
  text "BUS" at 639.76,-1931.1 h49.21 r315
  text "WR" at 748.03,-1931.1 h49.21 r315
  text "RD" at 846.46,-1931.1 h49.21 r315
  text "A12" at 944.88,-1931.1 h49.21 r315
  text "A13" at 1043.31,-1931.1 h49.21 r315
  text "A14" at 1141.73,-1931.1 h49.21 r315
  text "A15" at 1240.16,-1931.1 h49.21 r315
  text "A16" at 1338.58,-1931.1 h49.21 r315
  text "A17" at 1437.01,-1931.1 h49.21 r315
  text "A18" at 1545.28,-1931.1 h49.21 r315
  text "A19" at 1643.7,-1931.1 h49.21 r315
  text "A20" at 1742.13,-1931.1 h49.21 r315
  text "A21" at 1840.55,-1931.1 h49.21 r315
  text "A22" at 1938.98,-1931.1 h49.21 r315
  text "A23" at 2037.4,-1931.1 h49.21 r315
  text "TXD" at 2145.67,-1931.1 h49.21 r315
  text "RXD" at 2244.1,-1931.1 h49.21 r315
  text "SCLK" at 2342.52,-1931.1 h49.21 r315
  text "MOSI" at 2440.95,-1931.1 h49.21 r315
  text "MISO" at 2539.37,-1931.1 h49.21 r315
  text "SEL0" at 2647.64,-1931.1 h49.21 r315
  text "SEL1" at 2746.06,-1931.1 h49.21 r315
  text "SEL2" at 2844.49,-1931.1 h49.21 r315
  text "SEL3" at 2942.91,-1931.1 h49.21 r315
  text "+Vin" at 3041.34,-1931.1 h49.21 r315
  text "GND" at 3139.76,-1931.1 h49.21 r315
Mechanical 1:
  lines w15.75: 3204.67,-2204.1 ccw(c3188.98,-2007.87) 3385.83,-2007.87 3385.83,-196.85 ccw(c3188.98,-196.85) 3188.98,0 196.85,0 ccw(c196.85,-196.85) 0,-196.85 0,-2204.72 181.1,-2204.72 181.1,-2106.3 3204.72,-2106.3 3204.72,-2204.1
Drill Drawing:
  text "PCB parameters: HASL, FR-4, 1.8mm / 1oz, green soldermask, white overlay" at 295.28,-2716.53 h78.74